# Altium PCB fpga_v3.PcbDoc (part 1 of 3)
Units mm, origin at the board's own origin, x right, y up, seen from the top; angles counter-clockwise.
Board outline 160 x 147 mm, 2 copper layers (Top Layer, Bottom Layer); 241 components, 277 nets, 981 pads, 212 vias.
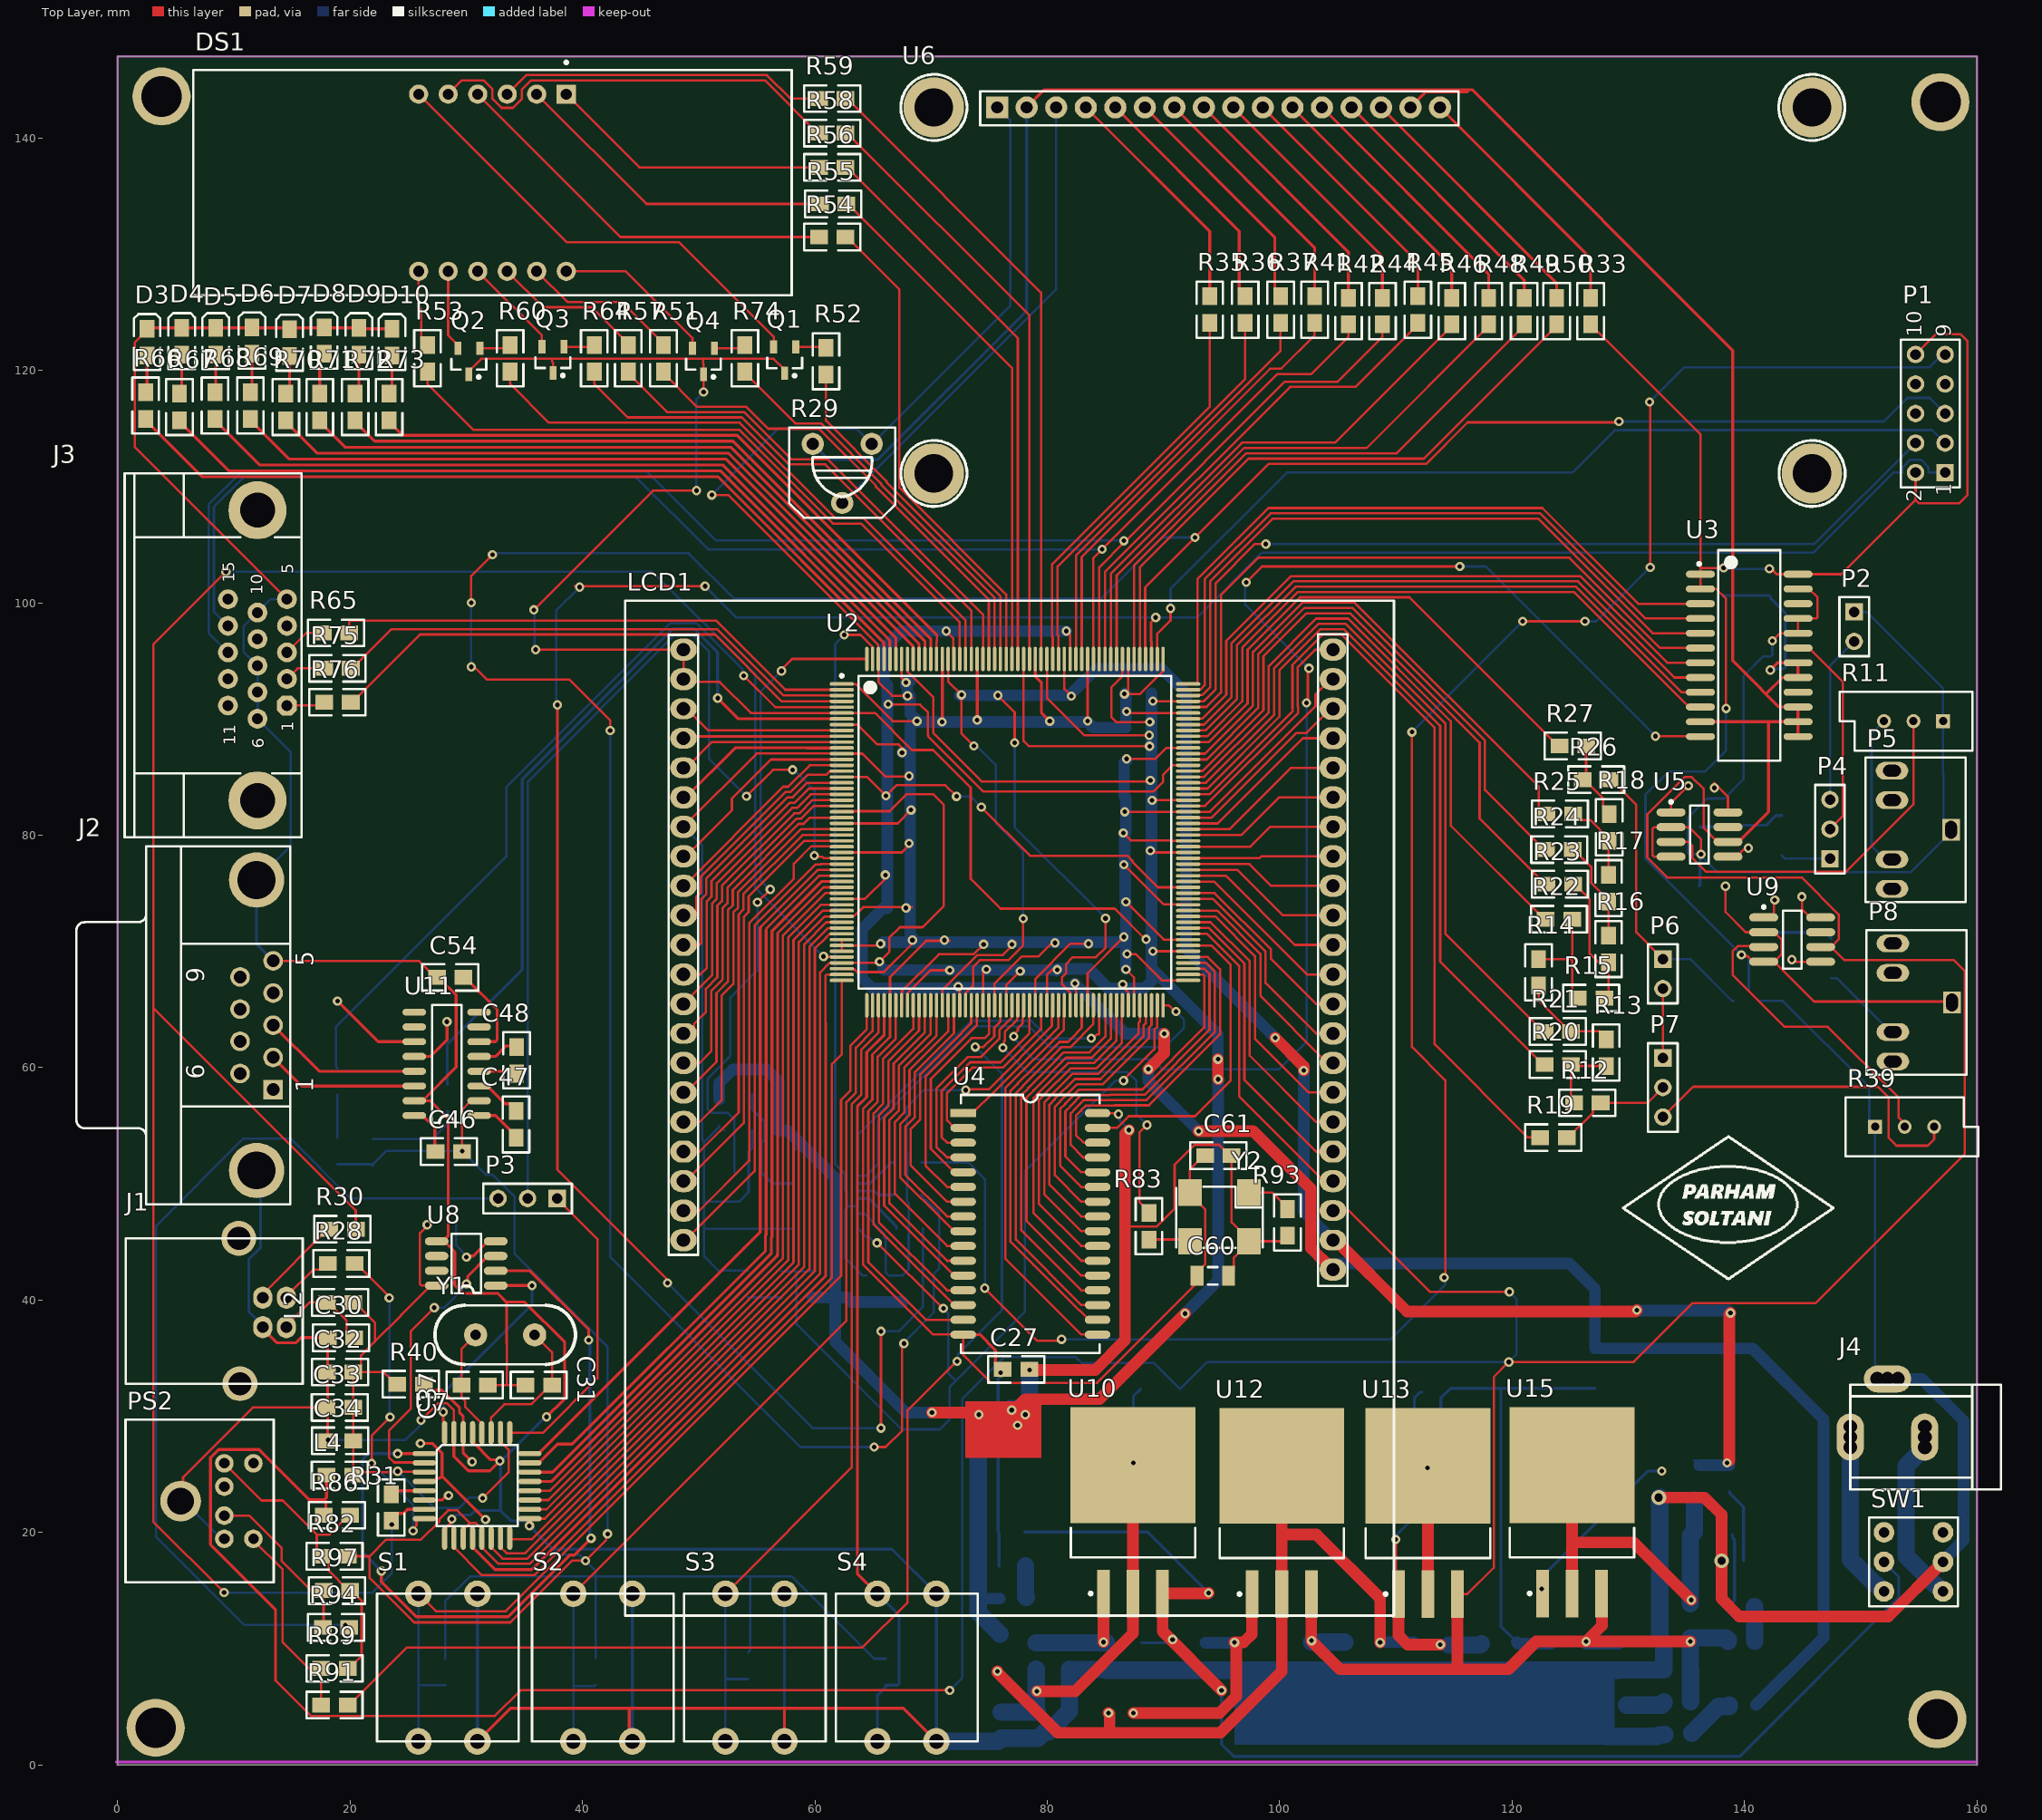
[diagram p0: Top Layer view]
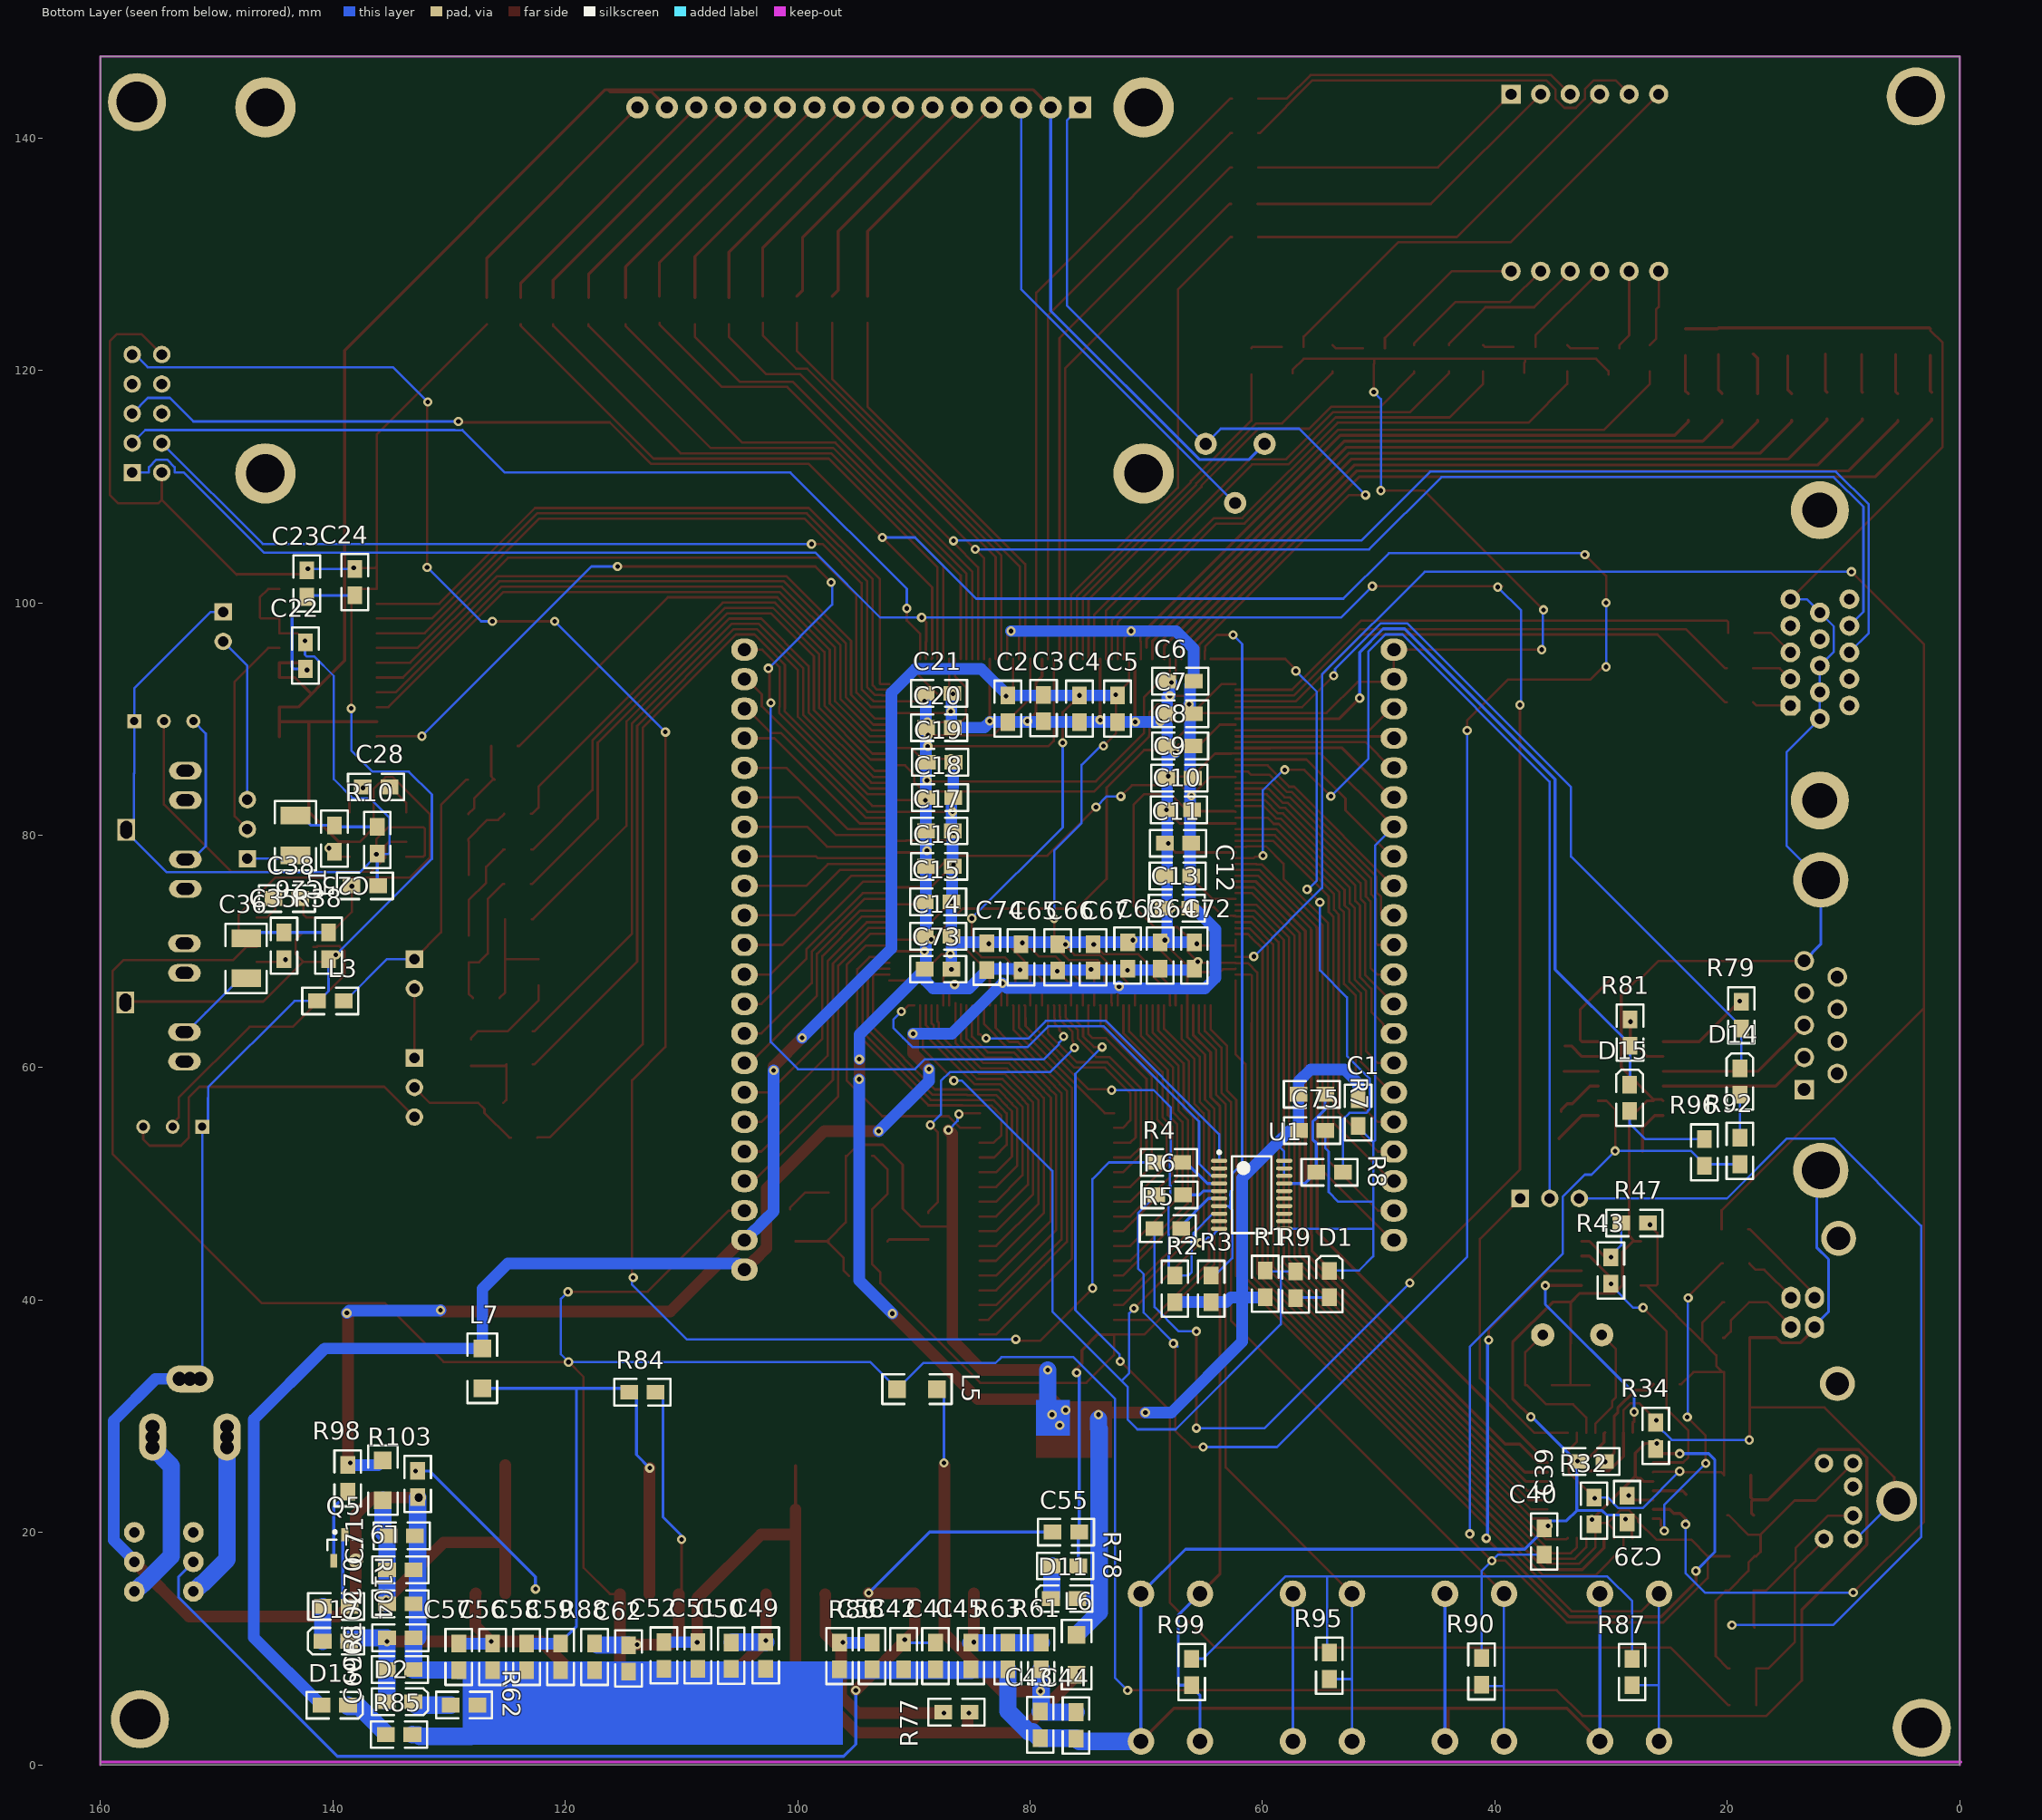
[diagram p1: Bottom Layer view, seen from below]

## Layer stack, top to bottom
Top Solder: solder mask 0.0102, Solder Resist, Dk 3.5
Top Layer: signal copper 0.0356
Dielectric 1: dielectric 0.32, FR-4, Dk 4.8
Bottom Layer: signal copper 0.0356
Bottom Solder: solder mask 0.0102, Solder Resist, Dk 3.5

## Board outline
0,0 0,147 160,147 160,0

## Design rules (kind name [scope] priority, off if disabled: settings)
Clearance [All] p1: gap=0.254 ignorepadtopadclearanceinfootprint=FALSE except(0: Arc-Hole Track-Hole SMDPad-Hole THPad-Hole Via-Hole Fill-Hole Poly-Hole Region-Hole Text-Hole; 0.1: SMDPad-SMDPad; 0.2: Arc-SMDPad Track-SMDPad)
ComponentClearance [All] p1: gap=0 collisioncheckmode=3 verticalgap=0 showdistances=FALSE
PolygonConnect [All] p1: connectstyle=Relief reliefconductorwidth=0.254 reliefentries=4 polygonreliefangle="90 Angle" airgapwidth=0.254
RoutingVias [All] p1: holewidth=0.711 width=1.27 viastyle="Through Hole" minholewidth=0.711 minwidth=1.27 maxholewidth=0.711 maxwidth=1.27
SolderMaskExpansion [All] p1: expansion=0.102 istentingtop=FALSE
Width [All] p1: maxlimit=1.5 minlimit=0.203 preferedwidth=0.254 minimp=50.000000 maximp=50.000000 favimp=50.000000
29 further rules are at their usual default settings.

## Components (designator, comment, footprint, x,y, rotation, side; value= is the part's Value field where it differs from the comment)
C1 "100nF" 0805 51.765,54.991 r270 bottom value=100n
C2 "10uF" 0805 81.915,89.738 r270 bottom
C3 "100nF" 0805 78.842,89.789 r270 bottom
C4 "100nF" 0805 75.743,89.738 r270 bottom
C5 "100nF" 0805 72.466,89.738 r270 bottom
C6 "10uF" 0805 68.209,93.25 r0 bottom
C7 "100nF" 0805 68.209,90.456 r0 bottom
C8 "100nF" 0805 68.234,87.688 r0 bottom
C9 "100nF" 0805 68.285,84.919 r0 bottom
C10 "100nF" 0805 68.336,82.176 r0 bottom
C11 "100nF" 0805 68.412,79.306 r0 bottom
C12 "100nF" 0805 68.437,76.486 r0 bottom
C13 "100nF" 0805 68.514,73.718 r0 bottom
C14 "10uF" 0805 86.766,71.298 r180 bottom
C15 "100nF" 0805 86.766,74.27 r180 bottom
C16 "100nF" 0805 86.665,77.318 r180 bottom
C17 "100nF" 0805 86.665,80.366 r180 bottom
C18 "100nF" 0805 86.614,83.236 r180 bottom
C19 "100nF" 0805 86.589,86.284 r180 bottom
C20 "100nF" 0805 86.665,89.256 r180 bottom
C21 "100nF" 0805 86.69,92.202 r180 bottom
C22 "4.7uF" 0805 142.342,96.596 r90 bottom
C23 "4.7uF" 0805 142.24,102.794 r90 bottom
C24 "100nF" 0805 138.1,102.921 r90 bottom
C25 "100nF" 0805 139.852,78.562 r270 bottom
C26 "250uF" 1210 143.205,81.686 r270 bottom
C27 "100nF" 0805 76.175,34.036 r180 top
C28 "10uF" 0805 135.128,84.15 r180 bottom
C29 "33nF" 0805 28.626,20.879 r270 bottom
C30 "100nF" 0805 20.371,36.754 r0 top
C31 "27pF" 0805 35.103,32.69 r180 top
C32 "10UF" 0805 20.295,33.807 r0 top
C33 "100nF" 0805 20.269,30.759 r0 top
C34 "100nF" 0805 20.295,27.889 r0 top
C35 "100nF" 0805 144.196,69.342 r270 bottom
C36 "250uF" 1210 147.447,71.12 r270 bottom
C37 "27pF" 0805 31.877,32.69 r0 top
C38 "10uF" 0805 142.799,74.549 r180 bottom
C39 "100nF" 0805 30.556,26.111 r180 bottom
C40 "100nF" 0805 35.763,18.085 r270 bottom
C41 "10uF" 0805 88.138,10.516 r90 bottom
C42 "100nF" 0805 90.88,10.516 r90 bottom
C43 "100nF" 0805 79.121,4.597 r90 bottom
C44 "10uF" 0805 76.048,4.547 r90 bottom
C45 "10uF" 0805 85.09,10.516 r90 bottom
C46 "10uF" 0805 27.356,52.781 r180 top
C47 "10uF" 0805 34.29,53.975 r270 top
C48 "10uF" 0805 34.341,59.487 r270 top
C49 "10uF" 0805 102.743,10.566 r90 bottom
C50 "100nF" 0805 105.715,10.541 r90 bottom
C51 "100nF" 0805 108.585,10.566 r90 bottom
C52 "10uF" 0805 111.506,10.566 r90 bottom
C53 "10uF" 0805 93.599,10.516 r90 bottom
C54 "10uF" 0805 27.483,67.767 r180 top
C55 "100nF" 0805 75.768,20.041 r180 bottom
C56 "10uF" 0805 126.238,10.439 r90 bottom
C57 "100nF" 0805 129.159,10.439 r90 bottom
C58 "100nF" 0805 123.317,10.439 r90 bottom
C59 "10uF" 0805 120.396,10.439 r90 bottom
C60 "10uF" c1206 94.234,42.088 r180 top
C61 "100nF" 0805 93.574,52.426 r180 top
C62 "10uF" 0805 114.554,10.312 r90 bottom
C63 "10uF" 0805 71.603,70.79 r90 bottom
C64 "100nF" 0805 68.809,70.79 r90 bottom
C65 "100nF" 0805 80.772,70.637 r90 bottom
C66 "100nF" 0805 77.622,70.637 r90 bottom
C67 "100nF" 0805 74.574,70.637 r90 bottom
C68 "10uF" 0805 135.331,10.947 r0 bottom
C69 "100nf" 0805 135.357,8.204 r0 bottom
C70 "100nF" 0805 135.331,16.789 r0 bottom
C71 "10uF" 0805 135.204,19.71 r0 bottom
C72 "100nF" 0805 65.862,70.79 r90 bottom
C73 "100nF" 0805 86.766,68.478 r180 bottom
C74 "100nF" 0805 83.718,70.688 r90 bottom
C75 "100nF" 0805 54.585,54.585 r180 bottom value=100n
D1 "LED-R" 0805AK 53.416,41.046 r180 bottom
D2 "LED-G" 0805AK 134.544,4.623 r270 bottom
D3 "LED-R" 0805AK 3.365,122.098 r0 top
D4 "LED-R" 0805AK 6.35,122.174 r0 top
D5 "LED-R" 0805AK 9.271,122.174 r0 top
D6 "LED-R" 0805AK 12.382,122.225 r0 top
D7 "LED-R" 0805AK 15.621,122.047 r0 top
D8 "LED-R" 0805AK 18.605,122.225 r0 top
D9 "LED-R" 0805AK 21.59,122.174 r0 top
D10 "LED-R" 0805AK 24.447,122.098 r0 top
D11 "LED-G" 0805AK 76.733,15.138 r90 bottom
D13 "LED-G" 0805AK 140.157,4.318 r270 bottom
D14 "LED-R" 0805AK 18.098,58.471 r180 bottom
D15 "LED-R" 0805AK 27.584,57.074 r180 bottom
D17 "LED-G" 0805AK 139.395,11.481 r90 bottom
DS1 "HDSP-B04E" HDSP-B4 32.258,136.144 r180 top
J1 "USB-B-F" USB2 14.529,40.208 r270 top
J2 "D Connector 9" DSUB1.385-2H9 2.464,63.652 r90 top
J3 "VGA" DB15SLC 14.58,99.797 r90 top
J4 "CON3" "POWER JACK" 149.098,27.33 r0 top
L1 "FERRITE BEAD" 0805 138.379,75.641 r0 bottom value=10mH
L2 "FERRITE BEAD" 0805 18.009,39.802 r180 top value=10mH
L3 "FERRITE BEAD" 0805 141.351,65.735 r0 bottom value=10mH
L4 "FERRITE BEAD" 0805 20.269,24.943 r0 top value=10mH
L5 "FERRITE BEAD" 1206 88.011,32.334 r0 bottom value=10mH
L6 "FERRITE BEAD" 1206 75.997,7.772 r90 bottom value=10mH
L7 "FERRITE BEAD" 1206 127.127,32.41 r90 bottom value=10mH
L9 "FERRITE BEAD" 1206 135.687,22.784 r90 bottom value=10mH
LCD1 "N96 LCD" Development 76.632,71.831 r0 top
P1 "Header 5X2" HDR2X5 157.251,111.201 r90 top
P2 "Header 2" HDR1X2 149.428,99.212 r270 top
P3 "Header 3" HDR1X3 37.821,48.743 r180 top
P4 "Header 3" HDR1X3 147.345,77.978 r90 top
P5 "Header 2" my_headphone 155.219,80.467 r270 top
P6 "Header 2" HDR1X2 132.969,69.342 r270 top
P7 "Header 3" HDR1X3 132.969,60.833 r270 top
P8 "Header 2" my_headphone 155.296,65.608 r270 top
PS2 "PS2-6PIN" PS2-6PIN 0.686,22.708 r90 top
Q1 "2N2222" SOT23_N 57.404,120.886 r270 top
Q2 "2N2222" SOT23_N 30.226,120.777 r270 top
Q3 "2N2222" SOT23_N 37.465,120.904 r270 top
Q4 "2N2222" SOT23_N 50.419,120.777 r270 top
Q5 "2N2222" SOT23_N 138.963,18.694 r90 bottom
R1 "330" 0805 59.766,42.545 r90 bottom value=330R
R2 "4.7k" 0805 67.539,42.113 r90 bottom
R3 "4.7k" 0805 64.414,42.113 r90 bottom
R4 "68" 0805 66.904,51.841 r180 bottom value=0R
R5 "68" 0805 67.005,46.152 r180 bottom value=0R
R6 "68" 0805 66.853,49.047 r180 bottom value=0R
R7 "1K" 0805 54.61,57.709 r180 bottom
R8 "0" 0805 53.086,51.003 r180 bottom value=0R
R9 "330" 0805 57.15,40.183 r270 bottom
R10 "10" 0805 136.169,78.435 r270 bottom value=1.8K
R11 "10k" VR5 154.534,89.814 r180 top value=10K
R12 "10K" 0805 127.61,56.972 r0 top
R13 "10K" 0805 128.092,60.147 r270 top
R14 "10K" 0805 122.276,67.056 r270 top
R15 "10K" 0805 125.654,65.989 r180 top
R16 "10K" 0805 128.295,69.063 r270 top
R17 "10K" 0805 128.295,74.295 r270 top
R18 "10K" 0805 128.346,79.527 r270 top
R19 "20K" 0805 122.403,53.975 r180 top
R20 "20K" 0805 122.784,60.274 r180 top
R21 "20K" 0805 122.784,63.119 r180 top
R22 "20K" 0805 122.885,72.771 r180 top
R23 "20K" 0805 122.961,75.794 r180 top
R24 "20K" 0805 122.911,78.765 r180 top
R25 "20K" 0805 122.961,81.839 r180 top
R26 "20K" 0805 128.372,84.785 r0 top
R27 "20K" 0805 124.079,87.681 r180 top
R28 "27" 0805 18.11,43.155 r180 top
R29 "5k" "POT MINI" 62.357,111.125 r180 top value=5K
R30 "27" 0805 18.212,46.101 r180 top
R31 "1.5K" 0805 23.546,21.006 r270 top
R32 "4.7k" 0805 31.471,23.012 r90 bottom
R33 "470" 0805 126.746,123.952 r270 top
R34 "10K" 0805 26.162,29.464 r90 bottom
R35 "270" 0805 93.98,124.079 r270 top
R36 "270" 0805 97.028,124.079 r270 top
R37 "270" 0805 100.076,124.079 r270 top
R38 "10" 0805 140.36,69.342 r270 bottom value=1.8K
R39 "10k" VR5 153.772,54.915 r0 top value=10K
R40 "470" 0805 26.365,32.766 r0 top
R41 "270" 0805 102.997,124.079 r270 top
R42 "270" 0805 105.918,123.952 r270 top
R43 "2.2K" 0805 30.023,43.688 r90 bottom
R44 "270" 0805 108.839,123.952 r270 top
R45 "270" 0805 111.887,124.079 r270 top
R46 "270" 0805 114.808,123.952 r270 top
R47 "10K" 0805 29.134,46.634 r0 bottom
R48 "270" 0805 117.983,123.952 r270 top
R49 "270" 0805 121.031,123.952 r270 top
R50 "270" 0805 123.825,123.952 r270 top
R51 "100" 0805 46.965,122.174 r90 top value=1K
R52 "4.7K" 0805 60.96,121.92 r90 top value=1K
R53 "100" 0805 26.67,122.174 r90 top value=1K
R54 "100" 0805 60.35,131.47 r180 top value=1K
R55 "100" 0805 60.427,134.315 r180 top value=1K
R56 "100" 0805 60.35,137.465 r180 top value=1K
R57 "100" 0805 43.942,122.174 r90 top value=1K
R58 "100" 0805 60.35,140.411 r180 top value=1K
R59 "100" 0805 60.35,143.383 r180 top value=1K
R60 "4.7K" 0805 33.782,122.174 r90 top value=1K
R61 "1K" 0805 79.045,8.23 r270 bottom
R62 "390" 0805 127.559,5.156 r180 bottom
R63 "3K" 0805 81.915,8.23 r270 bottom value=1.8K
R64 "4.7K" 0805 41.021,122.174 r90 top value=1K
R65 "270" 0805 19.939,97.409 r0 top
R66 "390" 0805 2.413,115.824 r270 top value=1K
R67 "390" 0805 5.334,115.697 r270 top value=1K
R68 "390" 0805 8.382,115.824 r270 top value=1K
R69 "390" 0805 11.43,115.824 r270 top value=1K
R70 "390" 0805 14.478,115.697 r270 top value=1K
R71 "390" 0805 17.399,115.697 r270 top value=1K
R72 "390" 0805 20.447,115.697 r270 top value=1K
R73 "390" 0805 23.368,115.697 r270 top value=1K
R74 "4.7K" 0805 53.975,122.174 r90 top value=1K
R75 "270" 0805 20.066,94.361 r0 top
R76 "270" 0805 20.066,91.44 r0 top
R77 "120" 0805 85.192,4.547 r180 bottom
R78 "270" 0805 75.844,17.12 r180 bottom
R79 "33" 0805 18.796,63.373 r270 bottom
R80 "200" 0805 96.393,8.23 r270 bottom value=1.8K
R81 "33" 0805 28.372,61.874 r270 bottom
R82 "0" 0805 19.812,17.958 r0 top value=1.8K
R83 "1K" 0805 88.748,47.498 r90 top
R84 "470" 0805 114.503,32.08 r0 bottom
R85 "220" 0805 133.147,2.616 r180 bottom
R86 "NA" 0805 17.729,21.488 r180 top
R87 "10K" 0805 28.194,6.858 r270 bottom value=1K
R88 "470" 0805 117.475,8.153 r270 bottom value=1.8K
R89 "10K" 0805 19.812,8.306 r0 top value=1.8K
R90 "10K" 0805 41.148,6.909 r270 bottom value=1K
R91 "330" 0805 19.812,5.156 r0 top value=1.8K
R92 "510" 0805 18.923,51.689 r270 bottom
R93 "10K" 0805 100.66,47.828 r90 top
R94 "330" 0805 19.939,11.836 r0 top value=1.8K
R95 "10K" 0805 54.254,7.391 r270 bottom value=1K
R96 "510" 0805 21.971,51.562 r270 bottom
R97 "10K" 0805 20.015,15.011 r0 top value=1.8K
R98 "470" 0805 138.709,25.806 r90 bottom
R99 "10K" 0805 66.091,6.858 r270 bottom value=1K
R102 "270" 0805 135.331,13.868 r0 bottom
R103 "0" 0805 132.69,23.038 r270 bottom value=1.8K
R104 "390" 0805 140.843,13.64 r0 bottom
S1 "SW-PB" Buttom 28.423,8.382 r90 top
S2 "SW-PB" Buttom 41.758,8.382 r90 top
S3 "SW-PB" Buttom 54.839,8.382 r90 top
S4 "SW-PB" Buttom 67.92,8.382 r90 top
SW1 "on/off" SWITCH 154.788,17.475 r180 top
U1 "XCF02SVO20C" VOG20_L 60.929,49.062 r180 bottom
U2 "XC3S400-4PQ208C" PQ208_M 77.216,80.264 r0 top
U3 "HI1175" SOIC127P1030X264-24N 140.4,95.473 r0 top
U4 "CY62148EV30" SOP32 72.048,56.083 r0 top
U5 "LM386M-1" D008_M 136.119,80.061 r0 top
U6 "LCD2X16" LCD 108.013,126.873 r0 top
U7 "FT245BL" sol-32 26.391,26.795 r0 top
U8 "AT93C46" so-8 32.537,41.25 r180 top
U9 "LM386M-1" D008_M 144.094,71.018 r0 top
U10 "LM1085IT-ADJ" DDPAK-EB3_M 87.376,21.107 r90 top
U11 "MAX3232EUE" SO-16 31.115,55.88 r180 top
U12 "LM1085IT-ADJ" DDPAK-EB3_M 100.178,21.057 r90 top
U13 "LM1085IT-ADJ" DDPAK-EB3_M 112.751,21.057 r90 top
U15 "LM1085IT-ADJ" DDPAK-EB3_M 125.146,21.107 r90 top
Y1 "6MHz" XTAL-2 30.81,37.008 r0 top
Y2 "40MHz" OSC-2 97.354,49.251 r180 top

## Footprints (in the part's own frame and the unit in brackets; to place one, negate y for a bottom-side part, rotate by r counter-clockwise, add the part's x,y. Pads: shape width x height; smd on the part's side, far side on the other; paste and mask are expansions set on the pad)
0805 [mil]
  rect 60x50 smd: 1(0,0) 2(-90,0)
  silkscreen extent -140,-45 50,45
0805AK [mil]
  rect 50x60 smd: 1(-32.49,-32) 2(-32.49,58)
  silkscreen extent -77,-82 13,108
1206 [mil]
  rect 60x60 smd: 1(0,0) 2(135,0)
  silkscreen extent -50,-50 185,50
1210 [mil]
  rect 60x100 smd: 1(0,0) 2(135,0)
  silkscreen extent -50,-70 185,70
Buttom [mil]
  round 90 hole 50: 1(-250,100) 2(-250,-100) 3(250,100) 4(250,-100)
  silkscreen extent -250,-240 250,240
c1206 [mm] "Chip Capacitor, Body 3.2x1.6mm, IPC High Density"
  rect 1.1x1.7 smd: 1(-1.35,0) 2(1.35,0)
  silkscreen extent -0.4,-0.75 0.4,0.75, body extent -1.7,-0.9 1.7,0.9, height 1.3
D008_M [mm] "8-Pin Small Outline Integrated Circuit 1.27 mm Pitch, IPC Low Density"
  oval 2.5x0.7 smd: 1(-2.45,1.905) 2(-2.45,0.635) 3(-2.45,-0.635) 4(-2.45,-1.905) 5(2.45,-1.905) 6(2.45,-0.635) 7(2.45,0.635) 8(2.45,1.905)
  silkscreen extent -2.57,-2.5 0.8,2.93, body extent -2,-2.5 2,2.5, height 1.75
DB15SLC [mil]
  oct 67x67 hole 37: 1(-340,0)
  round 67 hole 37: 2(-250,0) 3(-160,0) 4(-70,0) 5(20,0) 6(-385,100) 7(-295,100) 8(-205,100) 9(-115,100) 10(-25,100) 11(-340,200) 12(-250,200) 13(-160,200) 14(-70,200) 15(20,200)
  round 196.67 hole 118.33: BO1(321.67,100) BO2(-661.67,100)
  silkscreen extent -787,-50 447,550
DDPAK-EB3_M [mm] "D2-PAK, 4-Leads, Body 9x10.2mm, Pitch 2.54mm, Lead Span 15.2mm, IPC Low Density"
  rect 4.1x1.1 smd: 1(-6.35,2.54) 2(-6.35,0) 3(-6.35,-2.54)
  rect 9.97x10.75 smd: 2(4.685,0)
  silkscreen extent -6.47,-5.35 -0.7,5.35, body extent -3.25,-5.33 6.4,5.33, height 4.83
Development [mil]
  oval 90x75 hole 45: 1(-1100,950) 2(-1100,850) 6(-1100,450) 7(-1100,350) 8(-1100,250) 9(-1100,150) 10(-1100,50) 11(-1100,-50) 12(-1100,-150) 13(-1100,-250) 15(-1100,-450) 16(-1100,-550) 17(-1100,-650) 18(-1100,-750) 19(-1100,-850) 20(-1100,-950) 21(-1100,-1050) 22(1100,950) 23(1100,850) 24(1100,750) 25(1100,650) 26(1100,550) 27(1100,450) 28(1100,350) 29(1100,250) 30(1100,150) 31(1100,50) 32(1100,-50) 33(1100,-150) 34(1100,-250) 35(1100,-350) 36(1100,-450) 37(1100,-550) 38(1100,-650) 39(1100,-750) 40(1100,-850) 43(1100,-1150)
  oval 90x70 hole 45: 3(-1100,750) 4(-1100,650) 5(-1100,550) 14(-1100,-350) 41(1100,-950) 42(1100,-1050)
  silkscreen extent -1298,-2322 1307,1116
DSUB1.385-2H9 [mm] "Connector; D Subminiature; 9 Position; Right Angle; Pitch 1.385 mm"
  rect 1.69x1.69 hole 1.09: 1(-5.54,-10.92)
  round 1.69 hole 1.09: 2(-2.77,-10.92) 3(0,-10.92) 4(2.77,-10.92) 5(5.54,-10.92) 6(-4.155,-8.08) 7(-1.385,-8.08) 8(1.385,-8.08) 9(4.155,-8.08)
  round 4.76 hole 3.26: 10(-12.495,-9.5) 11(12.495,-9.5)
  silkscreen extent -15.4,-12.4 15.4,6
HDR1X2 [mm] "Connector; Header; 2 Position"
  rect 1.5x1.5 hole 0.9: 1(0,0)
  round 1.5 hole 0.9: 2(2.54,0)
  silkscreen extent -1.27,-1.27 3.81,1.27
HDR1X3 [mm] "Connector; Header; 3 Position"
  rect 1.5x1.5 hole 0.9: 1(0,0)
  round 1.5 hole 0.9: 2(2.54,0) 3(5.08,0)
  silkscreen extent -1.27,-1.27 6.35,1.27
HDR2X5 [mm] "Connector; Header; 5x2 Position"
  rect 1.5x1.5 hole 0.9: 1(0,0)
  round 1.5 hole 0.9: 2(0,2.54) 3(2.54,0) 4(2.54,2.54) 5(5.08,0) 6(5.08,2.54) 7(7.62,0) 8(7.62,2.54) 9(10.16,0) 10(10.16,2.54)
  silkscreen extent -1.27,-1.27 11.43,3.81
HDSP-B4 [mil] "LED, 7-Segment Display, 14.22 mm, Four Digit, 18:88; 12 Leads; Row Space 15.24 mm; Pitch 2.54 mm"
  rect 65x65 hole 37: 1(-250,-300)
  round 65 hole 37: 2(-150,-300) 3(-50,-300) 4(50,-300) 5(150,-300) 6(250,-300) 7(250,300) 8(150,300) 9(50,300) 10(-50,300) 11(-150,300) 12(-250,300)
  silkscreen extent -1014,-412 1014,382
LCD [mil]
  round 204.72 hole 129.92: 0(-1487.5,-620) 0(-1487.5,620) 0(1487.5,-620) 0(1487.5,620)
  rect 75x75 hole 41: 1(-1272.5,620)
  round 75 hole 41: 2(-1172.5,620) 3(-1072.5,620) 4(-972.5,620) 5(-872.5,620) 6(-772.5,620) 7(-672.5,620) 8(-572.5,620) 9(-472.5,620) 10(-372.5,620) 11(-272.5,620) 12(-172.5,620) 13(-72.5,620) 14(27.5,620) 15(127.5,620) 16(227.5,620)
  silkscreen extent -1599,-732 1600,732
my_headphone [mil]
  rect 75x60 hole 40 slot 60 at 0 deg: 1(0,100)
  oval 60x110 hole 40 slot 60 at 90 deg: 2(-200,-100) 3(-100,-100) 4(100,-100) 5(200,-100)
  silkscreen extent -245,-190 245,150
OSC-2 [mil]
  rect 80x90 smd: 1(0,0) 2(200,0) 3(200,165) 4(0,165)
  silkscreen extent -47,-20 246,187
"POT MINI" [mil]
  round 75 hole 41: 1(-100,-100) 2(100,-100) 3(0,100)
  silkscreen extent -180,-155 180,150
"POWER JACK" [mil]
  round 47 hole 47: 1(0,0) 1(0,70) 2(91,232) 2(161,232) 3(252,0) 3(252,70)
  oval 92x160 hole 47: 1(0,35) 3(252,35)
  oval 160x92 hole 47: 2(126,232)
  silkscreen extent 0,-142 510,212
PQ208_M [mm] "208-Pin Plastic Quad Flat Pack (PQ208), IPC Low Density"
  oval 2.1x0.3 smd: 1(-14.9,12.75) 2(-14.9,12.25) 3(-14.9,11.75) 4(-14.9,11.25) 5(-14.9,10.75) 6(-14.9,10.25) 7(-14.9,9.75) 8(-14.9,9.25) 9(-14.9,8.75) 10(-14.9,8.25) 11(-14.9,7.75) 12(-14.9,7.25) 13(-14.9,6.75) 14(-14.9,6.25) 15(-14.9,5.75) 16(-14.9,5.25) 17(-14.9,4.75) 18(-14.9,4.25) 19(-14.9,3.75) 20(-14.9,3.25) 21(-14.9,2.75) 22(-14.9,2.25) 23(-14.9,1.75) 24(-14.9,1.25) 25(-14.9,0.75) 26(-14.9,0.25) 27(-14.9,-0.25) 28(-14.9,-0.75) 29(-14.9,-1.25) 30(-14.9,-1.75) 31(-14.9,-2.25) 32(-14.9,-2.75) 33(-14.9,-3.25) 34(-14.9,-3.75) 35(-14.9,-4.25) 36(-14.9,-4.75) 37(-14.9,-5.25) 38(-14.9,-5.75) 39(-14.9,-6.25) 40(-14.9,-6.75) 41(-14.9,-7.25) 42(-14.9,-7.75) 43(-14.9,-8.25) 44(-14.9,-8.75) 45(-14.9,-9.25) 46(-14.9,-9.75) 47(-14.9,-10.25) 48(-14.9,-10.75) 49(-14.9,-11.25) 50(-14.9,-11.75) 51(-14.9,-12.25) 52(-14.9,-12.75) 105(14.9,-12.75) 106(14.9,-12.25) 107(14.9,-11.75) 108(14.9,-11.25) 109(14.9,-10.75) 110(14.9,-10.25) 111(14.9,-9.75) 112(14.9,-9.25) 113(14.9,-8.75) 114(14.9,-8.25) 115(14.9,-7.75) 116(14.9,-7.25) 117(14.9,-6.75) 118(14.9,-6.25) 119(14.9,-5.75) 120(14.9,-5.25) 121(14.9,-4.75) 122(14.9,-4.25) 123(14.9,-3.75) 124(14.9,-3.25) 125(14.9,-2.75) 126(14.9,-2.25) 127(14.9,-1.75) 128(14.9,-1.25) 129(14.9,-0.75) 130(14.9,-0.25) 131(14.9,0.25) 132(14.9,0.75) 133(14.9,1.25) 134(14.9,1.75) 135(14.9,2.25) 136(14.9,2.75) 137(14.9,3.25) 138(14.9,3.75) 139(14.9,4.25) 140(14.9,4.75) 141(14.9,5.25) 142(14.9,5.75) 143(14.9,6.25) 144(14.9,6.75) 145(14.9,7.25) 146(14.9,7.75) 147(14.9,8.25) 148(14.9,8.75) 149(14.9,9.25) 150(14.9,9.75) 151(14.9,10.25) 152(14.9,10.75) 153(14.9,11.25) 154(14.9,11.75) 155(14.9,12.25) 156(14.9,12.75)
  oval 0.3x2.1 smd: 53(-12.75,-14.9) 54(-12.25,-14.9) 55(-11.75,-14.9) 56(-11.25,-14.9) 57(-10.75,-14.9) 58(-10.25,-14.9) 59(-9.75,-14.9) 60(-9.25,-14.9) 61(-8.75,-14.9) 62(-8.25,-14.9) 63(-7.75,-14.9) 64(-7.25,-14.9) 65(-6.75,-14.9) 66(-6.25,-14.9) 67(-5.75,-14.9) 68(-5.25,-14.9) 69(-4.75,-14.9) 70(-4.25,-14.9) 71(-3.75,-14.9) 72(-3.25,-14.9) 73(-2.75,-14.9) 74(-2.25,-14.9) 75(-1.75,-14.9) 76(-1.25,-14.9) 77(-0.75,-14.9) 78(-0.25,-14.9) 79(0.25,-14.9) 80(0.75,-14.9) 81(1.25,-14.9) 82(1.75,-14.9) 83(2.25,-14.9) 84(2.75,-14.9) 85(3.25,-14.9) 86(3.75,-14.9) 87(4.25,-14.9) 88(4.75,-14.9) 89(5.25,-14.9) 90(5.75,-14.9) 91(6.25,-14.9) 92(6.75,-14.9) 93(7.25,-14.9) 94(7.75,-14.9) 95(8.25,-14.9) 96(8.75,-14.9) 97(9.25,-14.9) 98(9.75,-14.9) 99(10.25,-14.9) 100(10.75,-14.9) 101(11.25,-14.9) 102(11.75,-14.9) 103(12.25,-14.9) 104(12.75,-14.9) 157(12.75,14.9) 158(12.25,14.9) 159(11.75,14.9) 160(11.25,14.9) 161(10.75,14.9) 162(10.25,14.9) 163(9.75,14.9) 164(9.25,14.9) 165(8.75,14.9) 166(8.25,14.9) 167(7.75,14.9) 168(7.25,14.9) 169(6.75,14.9) 170(6.25,14.9) 171(5.75,14.9) 172(5.25,14.9) 173(4.75,14.9) 174(4.25,14.9) 175(3.75,14.9) 176(3.25,14.9) 177(2.75,14.9) 178(2.25,14.9) 179(1.75,14.9) 180(1.25,14.9) 181(0.75,14.9) 182(0.25,14.9) 183(-0.25,14.9) 184(-0.75,14.9) 185(-1.25,14.9) 186(-1.75,14.9) 187(-2.25,14.9) 188(-2.75,14.9) 189(-3.25,14.9) 190(-3.75,14.9) 191(-4.25,14.9) 192(-4.75,14.9) 193(-5.25,14.9) 194(-5.75,14.9) 195(-6.25,14.9) 196(-6.75,14.9) 197(-7.25,14.9) 198(-7.75,14.9) 199(-8.25,14.9) 200(-8.75,14.9) 201(-9.25,14.9) 202(-9.75,14.9) 203(-10.25,14.9) 204(-10.75,14.9) 205(-11.25,14.9) 206(-11.75,14.9) 207(-12.25,14.9) 208(-12.75,14.9)
  silkscreen extent -15.02,-13.45 13.45,13.57, body extent -14,-14 14,14, height 4.1
PS2-6PIN [mm] "PS2 Socket, 6 Pin, Through Hole"
  round 1.6 hole 0.9: 1(-1.25,-8.5) 2(1.25,-8.5) 3(-3.25,-8.5) 4(3.25,-8.5) 5(-3.25,-11) 6(3.25,-11)
  round 3.5 hole 2.3: S(0,-4.75)
  silkscreen extent -7,-12.75 7,0
so-8 [mil]
  oval 80x28 smd: 1(0,0) 2(0,-50) 3(0,-100) 4(0,-150) 5(200,-150) 6(200,-100) 7(200,-50) 8(200,0)
  silkscreen extent 50,-175 150,25
SO-16 [mil]
  oval 80x24 smd: 1(0,0) 2(0,-50) 3(0,-100) 4(0,-150) 5(0,-200) 6(0,-250) 7(0,-300) 8(0,-350) 9(220,-350) 10(220,-300) 11(220,-250) 12(220,-200) 13(220,-150) 14(220,-100) 15(220,-50) 16(220,0)
  silkscreen extent 60,-375 160,25
SOIC127P1030X264-24N [mm] "SOIC, 24-Leads, Body 17.90x7.50mm, Pitch 1.27mm, IPC Medium Density"
  oval 2.5x0.6 smd: 1(-4.2,6.985) 2(-4.2,5.715) 3(-4.2,4.445) 4(-4.2,3.175) 5(-4.2,1.905) 6(-4.2,0.635) 7(-4.2,-0.635) 8(-4.2,-1.905) 9(-4.2,-3.175) 10(-4.2,-4.445) 11(-4.2,-5.715) 12(-4.2,-6.985) 13(4.2,-6.985) 14(4.2,-5.715) 15(4.2,-4.445) 16(4.2,-3.175) 17(4.2,-1.905) 18(4.2,-0.635) 19(4.2,0.635) 20(4.2,1.905) 21(4.2,3.175) 22(4.2,4.445) 23(4.2,5.715) 24(4.2,6.985)
  silkscreen extent -4.44,-9.05 2.67,9.05, body extent -3.05,-9.05 3.05,9.05, height 2.64
sol-32 [mm]
  round 1 on Top Overlay: 0(1.854,-0.1)
  oval 2x0.45 smd: 1(0,0) 2(0,-0.8) 3(0,-1.6) 4(0,-2.4) 5(0,-3.2) 6(0,-4) 7(0,-4.8) 8(0,-5.6) 17(9.083,-5.6) 18(9.083,-4.8) 19(9.083,-4) 20(9.083,-3.2) 21(9.083,-2.4) 22(9.083,-1.6) 23(9.083,-0.8) 24(9.083,0)
  oval 0.45x2 smd: 9(1.754,-7.279) 10(2.554,-7.279) 11(3.354,-7.279) 12(4.154,-7.279) 13(4.954,-7.279) 14(5.754,-7.279) 15(6.554,-7.279) 16(7.354,-7.279) 25(7.354,1.804) 26(6.554,1.804) 27(5.754,1.804) 28(4.954,1.804) 29(4.154,1.804) 30(3.354,1.804) 31(2.554,1.804) 32(1.754,1.804)
  silkscreen extent 1.05,-6.25 8.05,0.75
SOP32 [mm]
  rect 2.2x0.7 smd: 1(0.72,0)
  oval 2.2x0.7 smd: 2(0.72,-1.27) 3(0.72,-2.54) 4(0.72,-3.81) 5(0.72,-5.08) 6(0.72,-6.35) 7(0.72,-7.62) 8(0.72,-8.89) 9(0.72,-10.16) 10(0.72,-11.43) 11(0.72,-12.7) 12(0.72,-13.97) 13(0.72,-15.24) 14(0.72,-16.51) 15(0.72,-17.78) 16(0.72,-19.05) 17(12.28,-19.05) 18(12.28,-17.78) 19(12.28,-16.51) 20(12.28,-15.24) 21(12.28,-13.97) 22(12.28,-12.7) 23(12.28,-11.43) 24(12.28,-10.16) 25(12.28,-8.89) 26(12.28,-7.62) 27(12.28,-6.35) 28(12.28,-5.08) 29(12.28,-3.81) 30(12.28,-2.54) 31(12.28,-1.27) 32(12.28,0)
  silkscreen extent 0.53,-20.62 12.47,1.57
SOT23_N [mm] "SOT23, 3-Leads, Body 2.9x1.3mm, Pitch 0.95mm, Lead Span 2.3mm - Reverse Pinning, IPC Medium Density"
  rect 1.15x0.6 smd: 1(1.125,0) 2(-1.125,-0.95) 3(-1.125,0.95)
  silkscreen extent -0.2,-1.5 1.47,1.5, body extent -0.7,-1.5 0.7,1.5, height 1.1
SWITCH [mil]
  round 70 hole 35: 1(-90,100) 2(110,100) 3(-90,0) 4(110,0) 5(-90,-100) 6(110,-100)
  silkscreen extent -140,-150 160,150
USB2 [mm]
  oval 1.905x1.651 hole 1: 1(2.54,0) 2(0,0) 3(0,-2.032) 4(2.54,-2.032)
  round 3 hole 2: ""(-5.1,-4.1) ""(7.4,-4)
  silkscreen extent -5.1,-13.83 7.4,1.4
VOG20_L [mm]
  oval 1.4x0.35 smd: 1(-2.8,2.925) 2(-2.8,2.275) 3(-2.8,1.625) 4(-2.8,0.975) 5(-2.8,0.325) 6(-2.8,-0.325) 7(-2.8,-0.975) 8(-2.8,-1.625) 9(-2.8,-2.275) 10(-2.8,-2.925) 11(2.8,-2.925) 12(2.8,-2.275) 13(2.8,-1.625) 14(2.8,-0.975) 15(2.8,-0.325) 16(2.8,0.325) 17(2.8,0.975) 18(2.8,1.625) 19(2.8,2.275) 20(2.8,2.925)
  silkscreen extent -2.93,-3.3 1.7,3.77
VR5 [mm] "Thru-Hole; 3 Leads"
  rect 1.2x1.2 hole 0.7: 1(-2.54,0)
  round 1.2 hole 0.7: 2(0,0) 3(2.54,0)
  silkscreen extent -5.08,-2.54 6.35,2.54
XTAL-2 [mm]
  round 2 hole 0.9: 1(0,0) 2(5.08,0)
  silkscreen extent -3.5,-2.54 8.58,2.54

## Part data
C1 C2 C3 C4 C5 C6 C7 C8 C9 C10 C11 C12 C13 C14 C15 C16 C17 C18 C19 C20 C21 C22 C23 C24 C27 C55 C63 C64 C65 C66 C67 C72 C73 C74 C75: library part Cap, "Capacitor", LatestRevisionDate=17-Jul-2002, LatestRevisionNote="Re-released for DXP Platform.", PackageReference=RAD-0.3, Published=8-Jun-2000, Publisher="Altium Limited"
C25 C35 C42 C43 C50 C51 C57 C58 C61 C69 C70: library part cap, "Capacitor", LatestRevisionDate=17-Jul-2002, LatestRevisionNote="Re-released for DXP Platform.", PackageReference=RAD-0.3, Published=8-Jun-2000, Publisher="Altium Limited"
C26 C28 C36 C38 C46 C47 C48 C54: library part "Cap Pol3", "Polarized Capacitor (Surface Mount)", LatestRevisionDate=17-Jul-2002, LatestRevisionNote="Re-released for DXP Platform.", PackageReference=C0805, Published=8-Jun-2000, Publisher="Altium Limited"
C29 C30 C31 C32 C33 C34 C37 C39 C40: library part CAP, "Capacitor"
C41 C44 C45 C49 C52 C53 C56 C59 C60 C62 C68 C71: library part cap2, "Capacitor", PackageReference=CAPR5-4X5, Published=23-Sep-2002, Publisher="Altium Limited"
D1 D2 D3 D4 D5 D6 D7 D8 D9 D10 D11 D13 D17: library part LED3, "Typical BLUE SiC LED", Published=8-Jun-2000, Publisher="Altium Limited", Revision 1="Jul-2002: Re-released for DXP Platform.", Revision 2="17-Dec-2003: PCB Footprint replaced."
D14 D15: library part LED0, "Typical INFRARED GaAs LED", LatestRevisionDate=08-Jul-2005, LatestRevisionNote="Mech Layer 1 removed.", PackageReference=LED-0, Published=8-Jun-2000, Publisher="Altium Limited"
DS1: "14.22 mm GaP HER, Untinted, 88:88 4-Digit 7-Segment Display: CA, Gray Surface", LED_Colour="High Efficiency Red (HER)", ComponentLink1Description="Manufacturer Link", ComponentLink1URL=http://www.agilent.com/, ComponentLink2Description=Datasheet, ComponentLink2URL=http://cp.literature.agilent.com/litweb/pdf/5988-3569EN.pdf, DatasheetVersion=21-Aug-2001, LatestRevisionDate=11-Oct-2004, LatestRevisionNote="Display outline superimposed on PCB Footprint.", LuminousIntensity="3200 ucd (Minimum).", PackageDescription="LED, 7-Segment Display, 14.22 mm, Four Digit, 88:88; 12 Leads; Row Space 15.24 mm; Pitch 2.54 mm", PackageReference=B-88, PackageVersion=21-Aug-2001, Published=26-May-2004, Publisher="Altium Limited"
J1: library part 440119-3, "USB 1.1, Right Angle, Thru-Hole, B Type, Receptacle, 4 Position, Beige", PackageDocument=12-Jan-2004, ComponentLink1Description="Manufacturer Link", ComponentLink1URL=http://www.tycoelectronics.com/, ComponentLink2Description="Packaging Specification", ComponentLink2URL=http://ecommas.tycoelectronics.com/commerce/DocumentDelivery/DDEController?Action=showdoc&DocId=Customer+Drawing%7F440119%7FC%7Ftif%7FEnglish%7FC_440119_C.tif, ContactMaterial="Copper Alloy", ContactPlating="Gold (5) over Nickel", DatasheetDocument=12-Jan-2004, DrillSize="Corresponds to nominal value.", HousingMaterial=Thermoplastic, PackageReference=440119, PanelGround=Without, PCB_Layout="Complies with manufacturer's recommendation.", Published=15-Jul-2004, Publisher="Altium Limited", TerminationLength="2.84mm [0.112in.]"
J2: "Receptacle Assembly, 9 Position, Right Angle", PackageDocument=O, DatasheetDocument=1-Sep-1999, Gender=Receptacle, LatestRevisionDate=17-Jul-2002, LatestRevisionNote="Re-released for DXP Platform.", Orientation="Right Angle", PackageReference=788750, Positions=9, Published=15-Jun-2001, Publisher="Altium Limited"
J3: library part "Connector 15", "Receptacle Assembly, 15-Pin, Sim Line Connector", PackageDocument=B, DatasheetDocument=24-Nov-1999, Gender="Receptacle Header", LatestRevisionDate=17-Jul-2002, LatestRevisionNote="Re-released for DXP Platform.", Orientation="Right Angle", PackageReference=788574, Positions=15, Published=15-Jun-2001, Publisher="Altium Limited"
L1 L2 L3 L4 L5 L6 L7 L9: library part Inductor, "Inductor", Code_IEC=1005, Code_JEITA=0402, LatestRevisionDate=17-Jul-2002, LatestRevisionNote="Re-released for DXP Platform.", PackageReference=0402-A, Published=8-Jun-2000, Publisher="Altium Limited"
P1: "Header, 5-Pin, Dual row", LatestRevisionDate=17-Jul-2002, LatestRevisionNote="Re-released for DXP Platform.", Publisher="Altium Limited"
P2 P5 P6 P8: "Header, 2-Pin", LatestRevisionDate=17-Jul-2002, LatestRevisionNote="Re-released for DXP Platform.", Publisher="Altium Limited"
P3 P4 P7: "Header, 3-Pin", LatestRevisionDate=17-Jul-2002, LatestRevisionNote="Re-released for DXP Platform.", Publisher="Altium Limited"
PS2: "6 Pin Through Hole PS2 Socket (Kycon P/N)", ComponentLink1Description="Manufacturer Link", ComponentLink1URL=http://www.oupiin.com/prodindx.html#Headers, Published=17-Dec-2003, Publisher="Altium Limited"
Q1 Q2 Q3 Q4 Q5: library part 2N3904, "NPN General Purpose Amplifier", ComponentLink1Description="Manufacturer Link", ComponentLink1URL=http://www.fairchildsemi.com/, ComponentLink2Description=Datasheet, ComponentLink2URL=http://www.fairchildsemi.com/ds/2N%2F2N3904.pdf, DatasheetVersion=1997, LatestRevisionDate=15-Jan-2003, LatestRevisionNote="PCB Footprint 'BCY-W3/D4.7' replaced", PackageDescription="TO, Flat Index; 3 In-Line, Axial Leads; Body Dia. 4.5mm; Leads 0.51 x 0.48 mm (max)", PackageReference=TO-92A, PackageVersion=Sep-1998, Published=8-Jun-2000, Publisher="Altium Limited"
R1 R2 R3 R4 R5 R6 R7 R8 R9 R33 R51 R52 R53 R54 R55 R56 R57 R58 R59 R60 R64 R66 R67 R68 R69 R70 R71 R72 R73 R74 R87 R90 R95 R99: library part Res1, "Resistor", Published=8-Jun-2000, Publisher="Altium Limited"
  R1 R2 R3 R4 R5 R6 R7 R8 R9: Revision="July-2002: Re-released for DXP Platform."
  R33 R51 R52 R53 R54 R55 R56 R57 R58 R59 R60 R64 R66 R67 R68 R69 R70 R71 R72 R73 R74 R87 R90 R95 R99: LatestRevisionDate=17-Jul-2002, LatestRevisionNote="Re-released for DXP Platform.", PackageReference=AXIAL-0.3
R10 R12 R13 R14 R15 R16 R17 R18 R19 R20 R21 R22 R23 R24 R25 R26 R27 R35 R36 R37 R38 R41 R42 R44 R45 R46 R48 R49 R50 R61 R63 R65 R75 R76 R77 R79 R80 R81 R82 R83 R84 R86 R88 R89 R91 R92 R94 R96 R97 R102 R103: library part res1, "Resistor", LatestRevisionDate=17-Jul-2002, LatestRevisionNote="Re-released for DXP Platform.", PackageReference=AXIAL-0.3, Published=8-Jun-2000, Publisher="Altium Limited"
R11 R29 R39: library part RPot, "Potentiometer", LatestRevisionDate=17-Jul-2002, LatestRevisionNote="Re-released for DXP Platform.", PackageReference=VR5, Published=8-Jun-2000, Publisher="Altium Limited", Set Position=0.5, Sim Note="Enter the Resistance value and the set point into parameter fields."
R28 R30 R31 R32 R34 R40 R43 R47 R93: library part RES1
R62 R78 R85 R98 R104: library part Res3, "Resistor", LatestRevisionDate=04-Mar-2005, LatestRevisionNote="PCB Footprint replaced.", PackageReference=J1-0603, Published=8-Jun-2000, Publisher="Altium Limited"
S1 S2 S3 S4: "Switch", LatestRevisionDate=17-Jul-2002, LatestRevisionNote="Re-released for DXP Platform.", PackageReference=SPST-2, Published=24-Mar-1999, Publisher="Altium Limited"
SW1: library part "SW SPST_1"
U1: "XCF00S Series, Platform Flash In-System Programmable Configuration 3.3V PROM, 20-Pin TSOP, 2-Megabit, Commercial Grade", Package Information="Latest Revision: ver1.0, May-2003", Package Reference=VO20, Code - JEDEC=MO-153-AC, Datasheet="Latest Revision: ver2.2, Dec-2003", Published=17-Sep-2003, Publisher="Altium Limited"
U2: "Spartan-3 1.2V FPGA, 141 User I/Os, 208-Pin PQFP, Standard Performance, Commercial Grade", Code_JEDEC=MS-029-FA-1, ComponentLink1Description="Manufacturer Link", ComponentLink1URL=http://www.xilinx.com/products/silicon_solutions/fpgas/spartan_series/spartan3_fpgas/index.htm, ComponentLink2Description=Datasheet, ComponentLink2URL=http://direct.xilinx.com/bvdocs/publications/ds099.pdf, DatasheetVersion="ver2.3, Nov-2007", LatestRevisionDate=13-Apr-2006, LatestRevisionNote="IPC-7351 Footprint Added.", Ordering Information="Additional code may have to be appended for different mask revision devices.", PackageDescription="208-Pin Plastic Quad Flat Pack (PQ208)", PackageReference=PQ208, PackageVersion="ver1.2, Jun-2004", Published=17-Sep-2003, Publisher="Altium Limited"
U4: "512Kx8 Bit  Static RAM(3.3V Operating)."
U5 U9: "Low Voltage Audio Power Amplifier", DigiKeyPartNumber=LM386M-1-ND, Manufacturer="National Semiconductor", PackageTopMarking=NSZXTT*LM386*M-1, Code_IPC=SOIC127P600-8, Code_JEDEC=MS-012-AA, ComponentLink1Description="LM386 Datasheet", ComponentLink1URL=http://www.national.com/ds/LM/LM386.pdf, ComponentLink2Description="LM386 Web Page", ComponentLink2URL=http://www.national.com/pf/LM/LM386.html, ComponentLink3Description="M08A Package Page", ComponentLink3URL=http://www.national.com/packaging/folders/m08a.html, CompType="Audio IC", DatasheetVersion=Aug-2000, PackageDescription="SOIC Narrow, 4.9 x 3.9 x 1.45mm, 8 Lead, 1.27mm Pitch", PackageReference=M08A, PackageVersion="revL, Sep-2006", PartNumber=LM386M-1, PinCount=8, Published=4-Dec-2008, RoHS=O
U7: "USB FIFO ( USB - Parallel)"
U8: "Three-wire Serial Epprom"
U10 U12 U13 U15: "3A Low Dropout Positive Regulators", DigiKeyPartNumber=LM1085IT-ADJ-ND, Manufacturer="National Semiconductor", PackageTopMarking=NSUZXYTTE#*LM1085*IT-ADJ, ComponentLink1Description="LM1085 Datasheet", ComponentLink1URL=http://www.national.com/ds/LM/LM1085.pdf, ComponentLink2Description="LM1085 Web Page", ComponentLink2URL=http://www.national.com/pf/LM/LM1085.html, ComponentLink3Description="T03B Package Page", ComponentLink3URL=http://www.national.com/packaging/folders/t03b.html, CompType="LDO IC", DatasheetVersion=Jun-2005, PackageDescription="TO-220, Molded, 3 Lead, Straight", PackageReference=T03B, PackageVersion="revL, Jan-1992", PartNumber=LM1085IT-ADJ, PinCount=3, Published=4-Dec-2008, Publisher="Altium Limited", RoHS=O
U11: library part MAX3232CUE, "3.0V TO 5.5V, Low-Power, up to 1Mbps, True RS-232 Transceiver Using Four 0.1µF External Capacitor", ComponentLink1Description="Manufacturer Link", ComponentLink1URL=http://www.maxim-ic.com/, ComponentLink2Description=Datasheet, ComponentLink2URL=http://pdfserv.maxim-ic.com/en/ds/MAX3222-MAX3241.pdf, DatasheetVersion=Mar-1999, LatestRevisionDate=29-May-2009, LatestRevisionNote="IPC-7351 Footprint Added.", PackageDescription="16-Pin Thin Small Outline Package 0.65 mm Pitch", PackageReference=TSSOP16, PackageVersion="21-0066 C", Published=16-Jan-2001, Publisher="Altium Limited"
Y1: library part CRYSTAL, "Crystal"
Y2: library part "OSC. CRYSTAL", "OSC."

## Free pads (board coordinates)
  round 5 hole 3.5: 2(156.845,143.078) 3(3.785,143.561) 4(3.277,3.2) 5(156.591,3.937)

## Via types
v1: diameter 0.8, hole 0.4, Top Layer to Bottom Layer, 210 vias
v2: diameter 1.27, hole 0.711, Top Layer to Bottom Layer, 2 vias

## Nets (pads, with @x,y where several pads share a name; then routed paths per layer and width w, separated by ;. In a path a pad name is that pad's centre, name@x,y a point inside that pad or via, vN(x,y) a via of type N, cw(c..) or ccw(c..) an arc to the next point about the centre after c; other vN are vias at no path point)
3.3V: C1.2 C14.2 C15.2 C16.2 C17.2 C18.2 C19.2 C20.2 C21.2 C27.2 C40.1 C46.2 C60.1 C61.2 C63.2 C64.2 C65.2 C66.2 C67.2 C72.2 C73.2 C74.2 C75.2 D11.1 L6.2 LCD1.1 LCD1.2 P1.4 Q1.1 Q2.1 Q3.1 Q4.1 R1.2 R2.2 R3.2 R7.2 R82.1 R87.2 R90.2 R92.1 R93.2 R95.2 R96.1 R99.2 U1.18 U1.19 U1.20 U2.6 U2.23 U2.49 U2.60 U2.73 U2.77 U2.84 U2.98 U2.110 U2.127 U2.136 U2.153 U2.164 U2.177 U2.181 U2.201 U4.32 U7.11 U7.13 U11.2 Y2.4 | length 821.5
  Top Layer w0.203: R82.1@19.812,17.958 21.692,17.958 ; C46.2@29.642,52.781 29.642,56.388 30.404,57.15 U11.2@31.115,57.15 ; U7.11@29.745,19.517 29.745,20.237 30.327,20.818 ; Q2.1@30.226,119.652 30.226,119.927 31.294,120.995 50.379,120.995 ; v1(35.814,99.39) 46.076,109.652 v1(49.809,109.652) ; v1(35.966,95.961) LCD1.1@48.692,95.961 LCD1.2@48.692,93.421 48.92,93.193 51.816,93.193 54.495,90.514 U2.6@62.316,90.514 65.163,90.514 68.351,87.325 70.187,87.325 73.406,84.106 73.406,76.251 75.971,73.685 85.801,73.685 v1@88.594,70.893 ; 37.389,120.952 37.389,120.735 37.465,120.659 Q3.1@37.465,119.779 ; v1(42.164,19.881) 42.05,19.767 42.05,19.368 v1(40.259,17.577) 40.138,17.456 40.062,17.456 40.062,17.498 39.983,17.577 39.109,17.577 33.801,12.268 25.509,12.268 21.692,16.085 21.692,17.958 ; v1(50.419,118.135) Q4.1@50.419,119.652 50.419,120.54 50.379,120.58 50.379,120.995 ; Q1.1@57.404,119.761 57.404,120.036 56.445,120.995 50.379,120.995 ; U2.23@62.316,82.014 62.359,82.057 62.505,82.057 62.511,82.062 66.441,82.062 67.92,83.541 70.18,83.541 71.095,82.626 71.095,73.914 69.266,72.085 67.31,72.085 66.396,71.171 66.396,70.995 66.415,70.976 66.415,70.35 66.396,70.331 66.396,69.952 v1(65.557,69.113) ; v1@65.786,68.986 65.758,69.014 65.557,69.014 U2.49@62.316,69.014 62.297,68.995 61.259,68.995 60.452,68.189 60.452,42.296 35.457,17.301 32.786,17.301 31.345,18.742 U7.13@31.345,19.517 31.345,20.292 30.818,20.818 30.327,20.818 ; U2.60@67.947,65.345 U2.60@67.966,65.364 67.966,66.29 68.014,66.338 68.014,66.451 69.94,68.377 v1(71.603,68.377) ; U2.201@67.966,95.164 67.966,94.088 68.416,93.638 70.206,91.848 70.206,90.07 70.187,90.051 70.187,88.792 74.346,84.633 v1@89.078,84.633 ; U2.73@74.466,65.364 74.466,68.167 v1(74.752,68.453) ; U2.77@76.466,65.364 76.466,67.093 v1(77.673,68.301) ; U2.181@77.966,95.164 77.966,88.113 78.423,87.655 v1(88.798,87.655) ; U2.84@79.966,65.364 79.966,67.977 80.416,68.428 v1(80.848,68.428) v1@80.899,68.377 ; U2.177@79.966,95.164 79.966,91.814 83.185,88.595 v1(88.773,88.595) ; U4.32@84.328,56.083 86.036,56.083 v1(86.121,55.999) ; v1@86.284,67.132 86.966,66.45 U2.98@86.966,65.364 ; U2.164@86.466,95.164 86.466,93.68 85.522,92.735 85.522,90.145 85.928,89.738 v1(88.824,89.738) v1@88.849,89.764 ; 87.03,46.326 89.399,46.326 90.956,47.883 90.956,51.632 92.687,53.362 94.796,53.362 95.733,52.426 C61.2@95.86,52.426 95.86,46.681 97.354,45.187 Y2.4@97.354,45.06 ; v1@89.002,82.982 v1(89.018,82.998) 89.034,83.014 U2.136@92.116,83.014 ; v1@89.027,69.952 v1(89.089,70.014) U2.110@92.116,70.014 ; v1@89.027,78.486 89.055,78.514 U2.127@92.116,78.514 ; v1(89.078,91.542) 89.105,91.514 U2.153@92.116,91.514 93.444,91.514 93.549,91.618 93.552,91.618 94.488,92.554 94.488,100.736 94.488,101.676 97.866,105.054 v1(98.806,105.054) ; C60.1@95.584,42.088 96.032,42.536 96.032,43.611 97.354,44.933 Y2.4@97.354,45.06 ; R93.2@100.178,45.06 Y2.4@97.354,45.06 ; 21.692,17.958 23.12,19.387 26.102,19.387 27.692,20.977 27.692,21.154 28.445,21.906 29.239,21.906 30.327,20.818
  Top Layer w1: v1(70.079,30.328) 73.939,30.328 v1(74.117,30.15) ; v1(77.445,29.235) 77.445,30.15 77.445,30.81 78.112,31.477 84.487,31.477 v1(91.846,38.837) ; v1(78.486,33.985) 84.125,33.985 86.69,36.551 86.69,54.29 v1(87.03,54.63) ; v1(94.686,60.726) 94.686,59.01 v1(94.691,59.004)
  Top Layer w1.5: v1(74.117,30.15) v1@76.937,30.15 ; 77.445,30.15 v1(78.105,30.15)
  Bottom Layer w0.203: R92.1@18.923,51.689 21.844,51.689 R96.1@21.971,51.562 ; R96.1@21.971,51.689 23.114,52.832 v1(29.654,52.832) 31.692,50.795 32.252,50.795 34.175,48.872 34.175,43.983 42.164,35.994 v1(42.164,19.881) ; R87.2@28.194,9.144 28.194,14.083 30.342,16.231 41.148,16.231 ; C40.1@35.763,18.085 39.751,18.085 v1(40.259,17.577) 41.148,16.688 41.148,16.231 ; v1(35.814,99.39) 35.89,99.314 35.89,96.037 v1(35.966,95.961) ; R90.2@41.148,9.195 41.148,16.231 ; v1(49.809,109.652) 49.809,117.526 v1(50.419,118.135) ; R95.2@54.254,9.677 54.432,9.855 54.432,16.18 ; C75.2@56.871,54.585 C75.2@56.896,54.61 ; U1.18@58.129,50.687 U1.19@58.129,51.337 U1.20@58.129,51.987 58.129,52.769 58.801,53.442 ; R1.2@59.766,40.259 R1.2@59.792,40.234 ; R99.2@66.091,9.144 65.086,9.144 57.999,16.231 54.483,16.231 54.432,16.18 ; L6.2@75.921,11.278 L6.2@75.997,11.201 ; v1(86.121,55.999) 86.235,55.885 86.235,55.426 v1(87.03,54.63) ; v1@98.552,105.054 v1(98.806,105.054) 146.025,105.054 P1.4@154.711,113.741 ; 41.148,16.231 54.381,16.231 54.432,16.18
  Bottom Layer w1: C1.2@51.765,57.277 51.765,58.674 52.934,59.842 55.855,59.842 56.896,58.801 R7.2@56.896,57.709 C75.2@56.896,54.61 ; C75.2@56.871,54.585 57.658,54.585 58.801,53.442 61.747,50.495 61.747,40.234 ; R1.2@59.792,40.234 61.747,40.234 ; C72.2@65.862,68.504 65.964,68.402 68.809,68.402 71.603,68.402 74.752,68.402 77.673,68.402 C65.2@80.772,68.402 ; R2.2@67.539,39.827 R3.2@64.414,39.827 63.127,39.827 62.721,40.234 61.747,40.234 ; v1(70.079,30.328) 67.843,30.328 61.747,36.424 61.747,40.234 ; 74.056,14.3 74.069,14.313 D11.1@75.921,14.313 ; C65.2@80.772,68.351 v1(80.848,68.428) ; C65.2@80.823,68.402 80.823,68.418 80.907,68.502 83.618,68.502 C74.2@83.718,68.402 83.718,68.351 85.242,66.827 88.341,66.827 89.002,67.488 89.002,68.428 C73.2@89.052,68.478 ; C21.2@88.976,92.202 88.976,91.542 88.976,89.738 88.976,89.256 88.976,88.595 88.976,87.655 88.976,86.284 88.976,84.709 88.976,82.998 88.976,80.366 88.976,78.664 88.976,77.318 88.976,74.27 88.976,71.044 88.976,70.014 88.976,68.555 C73.2@89.052,68.478 ; v1(91.846,38.837) 94.691,41.681 v1(94.691,59.004) ; v1(94.686,60.726) 94.686,62.845 C73.2@89.052,68.478
  Bottom Layer w1.5: v1@74.117,29.769 74.117,28.981 74.056,28.92 74.056,14.3 74.056,13.142 L6.2@75.921,11.278 ; v1(78.105,30.15) 78.486,30.531 v1(78.486,33.985)
  other v1: 76.937,30.531 86.487,67.158 88.494,71.044 88.875,78.664 88.875,84.709
+5V: C22.2 C23.2 C24.2 C49.1 C50.1 C56.1 C57.1 C68.1 C69.1 D2.1 D17.1 L4.2 L5.2 LCD1.41 R29.2 R86.1 U3.11 U3.13 U3.14 U3.15 U3.17 U3.18 U5.6 U6.2 U6.15 U9.6 U12.3 U13.3 U15.3 | length 593
  Top Layer w0.203: 13.589,10.109 13.589,7.27 16.639,4.22 32.468,4.22 34.674,6.426 v1(71.603,6.426) ; LCD1.41@104.572,47.701 105.918,47.701 112.903,40.716 113.934,40.716 113.939,40.712 114.564,40.712 114.569,40.716 v1(119.761,40.716) ; 115.291,8.306 115.367,8.23 ; U13.3@115.291,14.707 116.145,14.707 118.427,16.988 118.427,33.388 v1(119.71,34.671) ; v1@119.736,34.671 130.459,34.671 135.531,39.743 146.118,39.743 158.953,52.578 158.953,68.283 157.97,69.266 148.562,69.266 U9.6@147.444,70.383 ; U5.6@138.569,79.426 137.669,79.426 136.486,80.608 136.486,83.987 135.466,85.007 134.84,85.007 131.623,81.79 131.623,78.085 133.344,76.364 144.925,76.364 148.096,73.193 148.096,71.035 U9.6@147.444,70.383 ; U9.6@146.544,70.383 U9.6@147.444,70.383
  Top Layer w0.254: 13.589,10.109 13.589,13.384 8.005,18.968 8.005,26.447 8.696,27.139 12.175,27.139 16.504,22.809 17.78,22.809 ; R86.1@17.729,21.488 17.929,21.688 17.929,22.66 17.78,22.809 ; L4.2@17.983,24.943 17.983,23.012 17.78,22.809 ; U6.2@78.232,142.621 79.756,144.145 116.332,144.145 ; U6.15@111.252,142.621 112.585,143.954 116.141,143.954 116.332,144.145 ; U3.11@136.2,89.758 142.062,89.758 ; U5.6@138.569,79.426 139.469,79.426 142.062,82.019 142.062,89.758 ; v1(142.215,94.209) 142.844,94.838 U3.18@144.6,94.838 U3.17@144.6,93.568 143.25,93.568 141.84,92.157 ; U3.13@144.6,88.488 U3.14@144.6,89.758 ; 116.332,144.145 116.542,144.145 138.982,121.705 138.982,95.014 141.046,92.951 141.84,92.157 ; 141.84,92.157 142.969,91.028 U3.15@144.6,91.028 U3.14@144.6,89.758 ; 142.062,89.758 U3.14@144.6,89.758
  Top Layer w1: U12.3@102.718,14.707 102.718,10.693 105.181,8.23 115.367,8.23 119.672,8.23 122.06,10.617 v1(126.365,10.617) ; 115.291,8.306 U13.3@115.291,14.707 ; U15.3@127.686,14.757 127.735,14.708 127.735,11.987 126.39,10.643 126.39,10.617 v1(135.331,10.617)
  Bottom Layer w0.203: v1@71.687,6.621 71.798,6.621 72.695,7.518 72.695,31.523 76.262,35.091 82.473,35.091 82.982,34.582 89.192,34.582 L5.2@91.44,32.334 93.777,34.671 v1(119.71,34.671) 120.371,35.331 120.371,40.107 v1(119.761,40.716) ; C56.1@126.238,10.439 C56.1@126.373,10.439
  Bottom Layer w0.254: R29.2@59.817,113.665 61.151,112.331 65.449,112.331 78.232,125.114 U6.2@78.232,142.621 ; C24.2@138.1,100.635 142.113,100.635 C23.2@142.24,100.508 142.24,100.381 143.506,99.114 143.506,94.459 143.358,94.31 C22.2@142.342,94.31
  Bottom Layer w1: v1(126.365,10.617) 126.365,10.447 126.373,10.439 C57.1@129.159,10.439
  Bottom Layer w1.5: C49.1@102.743,10.566 105.586,10.566 C50.1@105.6,10.553 ; D2.1@135.357,5.448 135.345,5.46 135.345,8.191 135.331,8.204 C68.1@135.331,10.947 138.394,10.947 138.582,10.759 D17.1@138.582,10.656
  other v1: 102.743,10.693
A0: DS1.12 Q4.2 | length 14.1
  Top Layer w0.203: DS1.12@38.608,128.524 43.727,128.524 49.469,122.782 Q4.2@49.469,121.902
A1: DS1.9 Q3.2 | length 8.8
  Top Layer w0.203: DS1.9@30.988,128.524 36.515,122.997 Q3.2@36.515,122.029
A2: DS1.8 Q2.2 | length 7
  Top Layer w0.203: DS1.8@28.448,128.524 28.448,123.005 29.276,122.177 Q2.2@29.276,121.902
A3: DS1.6 Q1.2 | length 40.1
  Top Layer w0.203: DS1.6@25.908,143.764 38.659,131.013 48.332,131.013 56.454,122.891 Q1.2@56.454,122.011
ADC_ANALOGIN: P4.2 U3.19 | length 18.2
  Top Layer w0.203: U3.19@144.6,96.108 145.55,96.108 148.451,93.207 148.451,81.624 P4.2@147.345,80.518
ADC_ANALOGIN1: P2.2 P4.3 | length 14.5
  Bottom Layer w0.203: P4.3@147.345,83.058 147.345,94.59 P2.2@149.428,96.672
ADC_ANALOGIN2: C26.2 P4.1 | length 4.3
  Bottom Layer w0.203: C26.2@143.205,78.257 143.485,77.978 P4.1@147.345,77.978